# Altium PCB PCB1.PcbDoc (part 2 of 2)
Units mil, origin at the board's own origin, x right, y up, seen from the top; angles counter-clockwise.
Board outline 3937.01 x 3937.01 mil, 2 copper layers (Top Layer, Bottom Layer); 165 components, 130 nets, 568 pads, 491 vias.
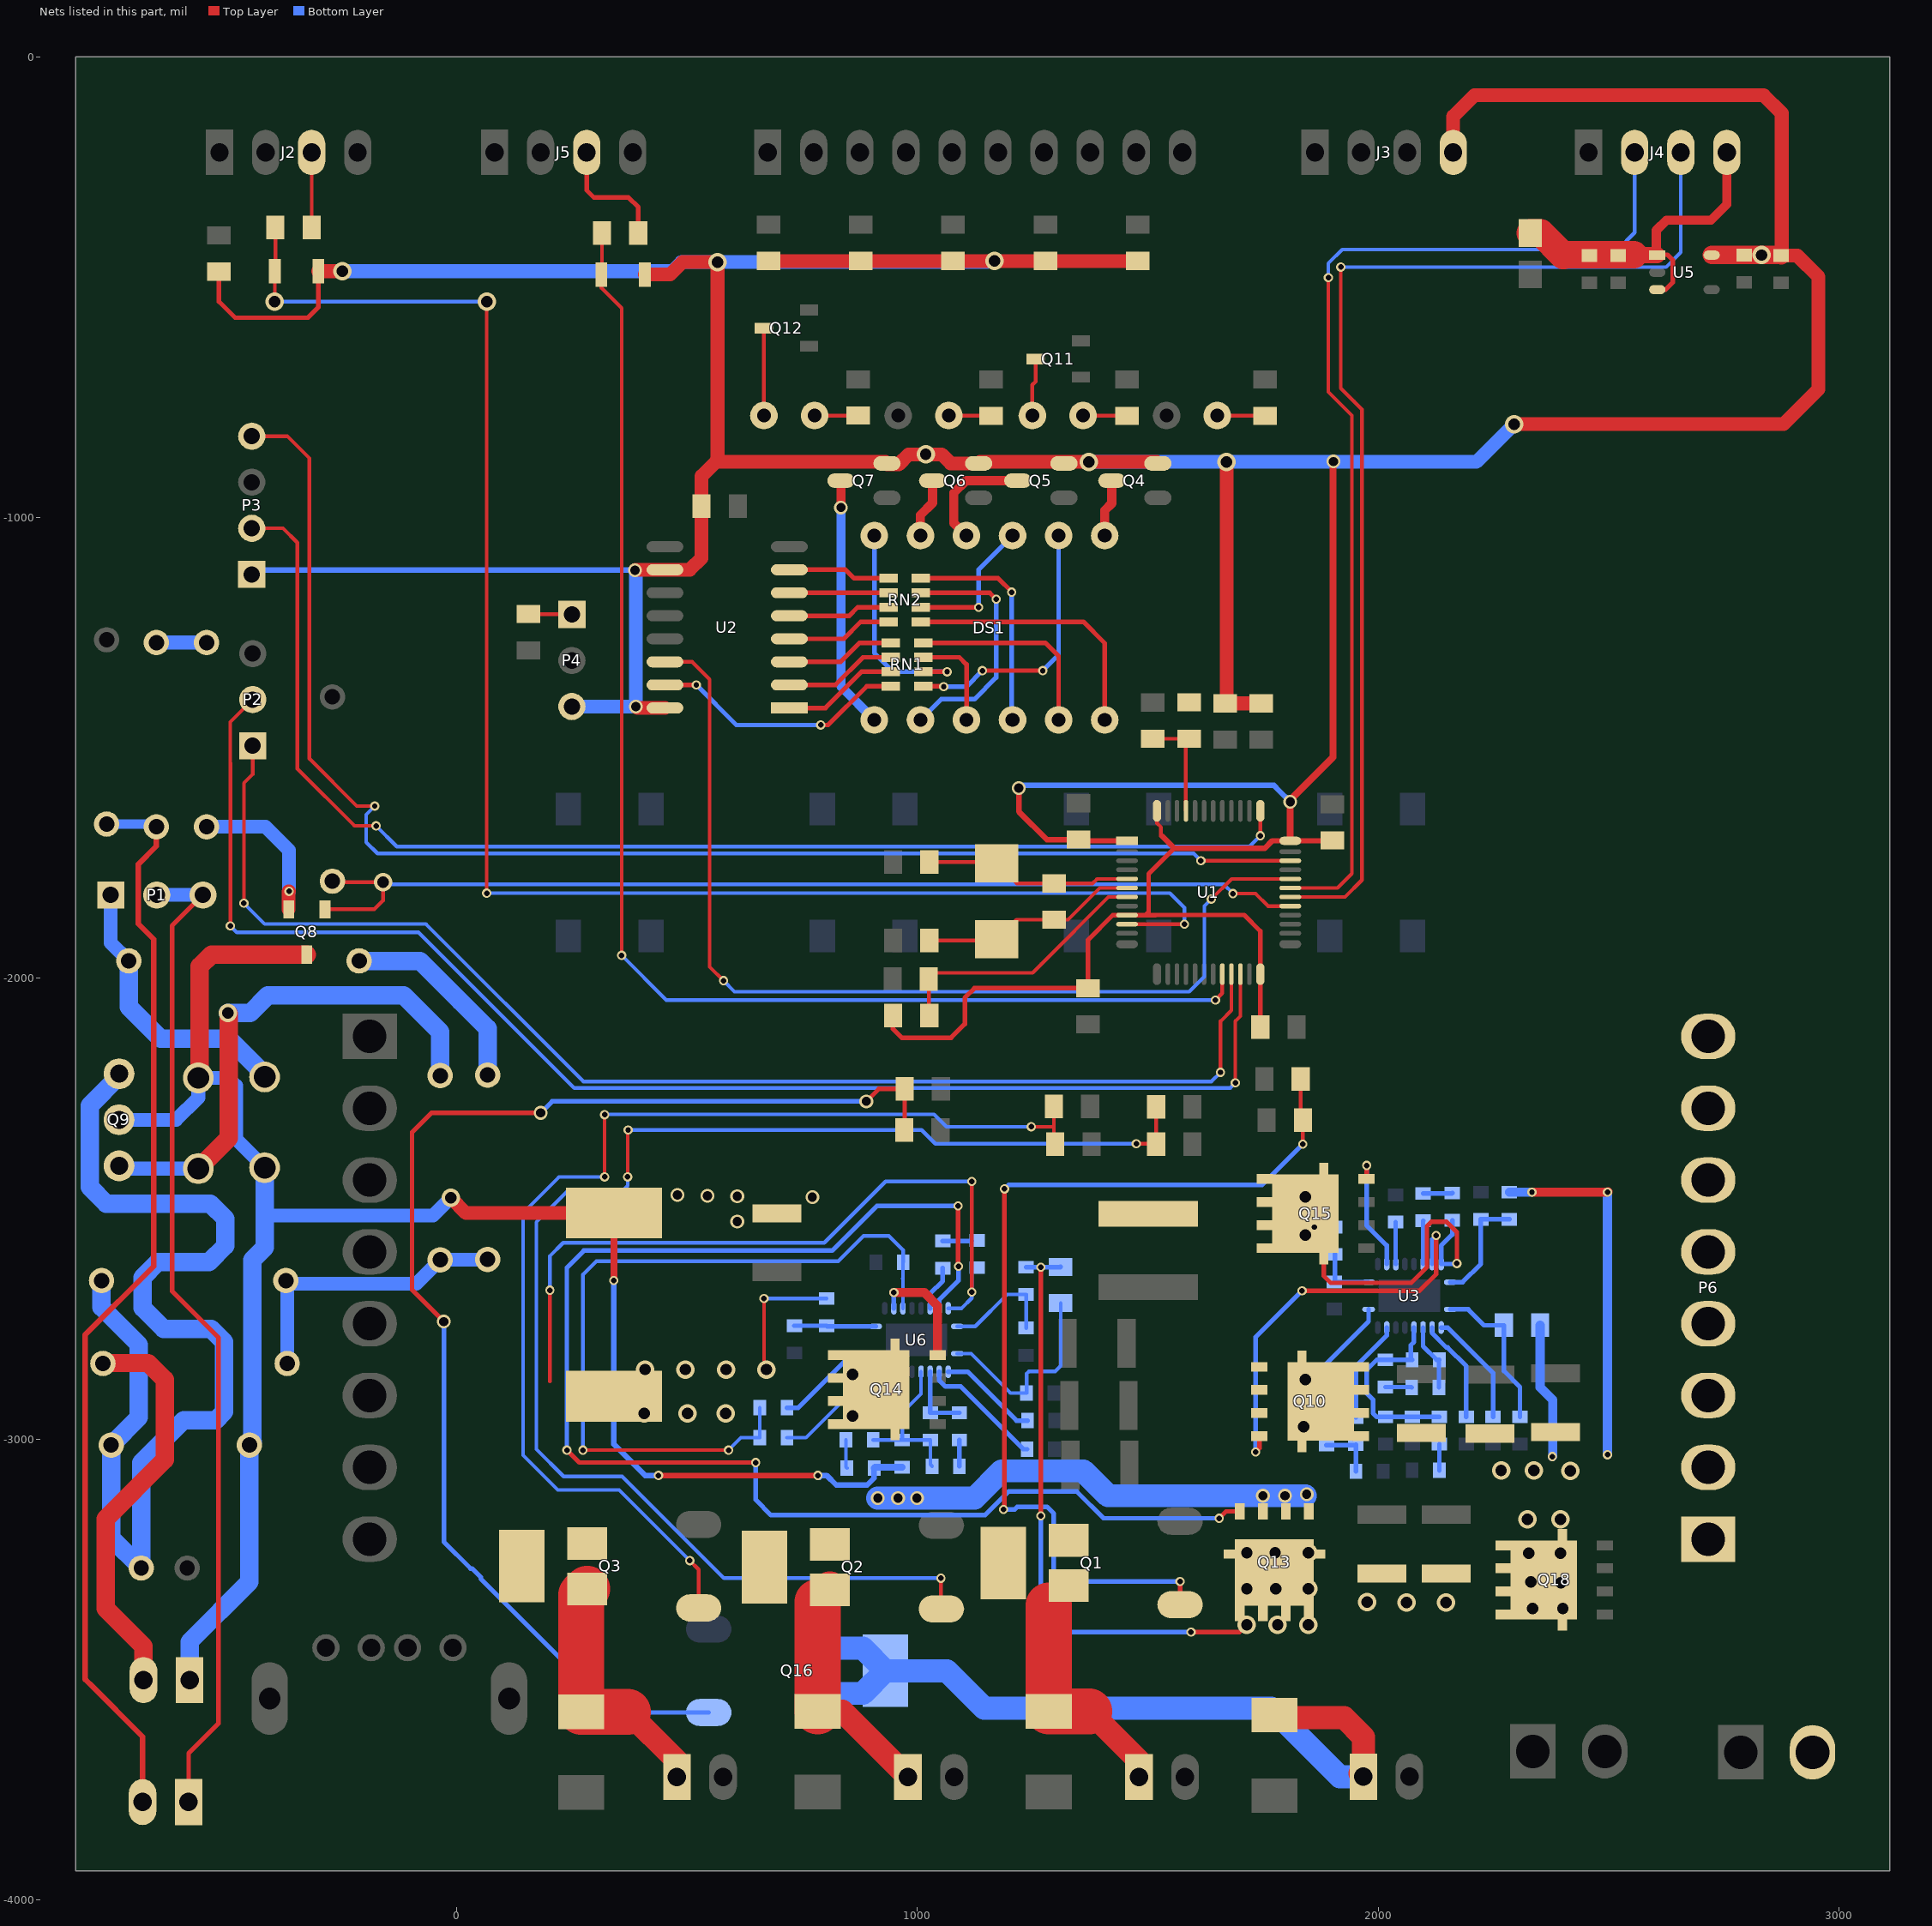
[diagram p2: the nets of this part, all layers, seen from the top]

## Via types
v1: diameter 30, hole 20, Top Layer to Bottom Layer, tented both sides, 241 vias
v2: diameter 20, hole 12, Top Layer to Bottom Layer, tented both sides, 174 vias
v3: diameter 40, hole 25, Top Layer to Bottom Layer, tented both sides, 75 vias
v4: diameter 50, hole 28, Top Layer to Bottom Layer, 1 vias

## Nets (pads, with @x,y where several pads share a name; then routed paths per layer and width w, separated by ;. In a path a pad name is that pad's centre, name@x,y a point inside that pad or via, vN(x,y) a via of type N, cw(c..) or ccw(c..) an arc to the next point about the centre after c; other vN are vias at no path point) (continued)
M74HC595_SI: U1.32 U2.14 | length 2210.5
  Top Layer w8: U2.14@452,-1313 511.01,-1313 549.01,-1350.99 549.01,-1975.01 v2(579,-2005) ; v2(1638,-1828) 1681.95,-1784.05 U1.32@1809.33,-1784.05
  Bottom Layer w8: v2(579,-2005) 603,-2029 1590,-2029 1623,-1996 1623,-1843 v2(1638,-1828)
NetC1_2: C1.2 R14.2 U1.5 Y1.2 | length 452.5
  Top Layer w8: C1.2@1025.74,-1747.62 1169.68,-1747.62 Y1.2@1172,-1749.94 1215.94,-1793.88 R14.2@1297,-1793.88 1380.12,-1793.88 1389.95,-1784.05 U1.5@1455,-1784.05
NetC2_2: C2.2 R14.1 U1.6 Y1.1 | length 476.4
  Top Layer w8: C2.2@1025.74,-1917.62 1169.68,-1917.62 Y1.1@1172,-1915.3 1214.68,-1872.62 R14.1@1297,-1872.62 1326.83,-1872.62 1395.72,-1803.74 U1.6@1455,-1803.74
NetC3_2: C3.2 R15.2 U1.7 | length 563.6
  Top Layer w8: R15.2@1024.74,-2081 C3.2@1024.74,-2021.62 ; C3.2@1024.74,-2002 1038.74,-1988 1250,-1988 1269,-1969 1414.58,-1823.42 U1.7@1455,-1823.43
NetC12_2: C12.2 R27.2 U3.11 | length 134.9
  Bottom Layer w10: R27.2@1906,-2599.06 1906,-2657.94 C12.2@1905,-2658.94 1905.53,-2659.47 U3.11@1979.42,-2659.47
NetC14_1: C14.1 C32.1 U3.4 | length 148.7
  Bottom Layer w10: U3.4@2097.53,-2757.9 2097.53,-2798.53 2127,-2828 C32.1@2133,-2828 2132,-2829 C14.1@2132,-2888
NetC14_2: C14.2 R29.2 | length 57.3
  Bottom Layer w10: R29.2@2016,-2887.06 2072,-2887.06 C14.2@2072.94,-2888
NetC15_1: C15.1 U6.3 | length 271.1
  Bottom Layer w10: U6.3@1047.21,-2853.9 1047.21,-2872.21 1061,-2886 1094,-2886 1230,-3022 C15.1@1238,-3022
NetC16_1: C16.1 L2.2 P1.1 | length 620
  Bottom Layer w30: P1.1@-751,-1819 -751,-1922.95 L2.2@-711.95,-1962
  Bottom Layer w40: L2.2@-711.95,-1962 -711.95,-2062.05 -643,-2131 -495,-2131 -417,-2209 C16.1@-417,-2214
NetC17_1: C17.1 C46.2 L4.1 Q9.3 | length 2451.8
  Bottom Layer w30: Q9.3@-733,-2212.23 Q9.3@-733,-2207
  Bottom Layer w40: C46.2@-771,-2656 -771,-2714 -690,-2795 -690,-2953 C17.1@-750,-3013 -750,-3215 L4.1@-685,-3280 -685,-3051 -593,-2959 -523,-2959 -505,-2941 -505,-2789.13 -533.13,-2761 -636,-2761 -682,-2715 -682,-2649 -649,-2616 -538,-2616 -502,-2580 -502,-2522 -535,-2489 -760.77,-2489 -796.77,-2453 -796.77,-2276 Q9.3@-733,-2212.23
NetC18_1: C18.1 U3.3 | length 226.3
  Bottom Layer w10: U3.3@2117.21,-2757.9 2117.21,-2770.21 2148.27,-2801.27 2150.92,-2801.27 2191.25,-2841.6 C18.1@2191.25,-2951.94
NetC21_1: C21.1 R19.1 | length 63.4
  Bottom Layer w10: R19.1@2098,-2467 2160,-2467 C21.1@2161,-2466
NetC21_2: C21.2 L1.1 Q10.1 Q10.2 Q10.3 Q15.5 Q15.6 Q15.7 Q15.8 R27.1 U3.19 | length 721.6
  Top Layer w10: Q15.8@1882.08,-2589.36 1882.08,-2646.08 1897,-2661 2072,-2661 2106,-2627 2106,-2538 2116,-2528 2148,-2528 2171,-2551 v2(2171,-2619)
  Bottom Layer w10: v2@1861,-2539 v2(1862,-2540) R27.1@1906,-2540 ; C21.2@2161,-2525.06 2161,-2556 2136.9,-2580.1 U3.19@2136.9,-2620.1 2169.9,-2620.1 v2(2171,-2619)
  other v3: 1841.72,-2556.83 1841.72,-2474.41
NetC22_2: C22.2 R21.2 U3.20 | length 241.7
  Bottom Layer w10: U3.20@2156.58,-2659.47 2183.53,-2659.47 2223,-2620 C22.2@2223,-2523.06 R21.2@2285,-2523.06
NetC23_1: C23.1 C46.1 R60.1 R61.1 | length 655.2
  Top Layer w30: C46.1@-371,-2656 C46.1@-364.09,-2662.91 ; R61.1@-36,-2611 R61.1@-35,-2610
  Bottom Layer w30: C23.1@-371,-2833 C23.1@-368,-2836 C46.1@-368,-2659 ; C46.1@-371,-2656 C46.1@-368,-2659 ; R60.1@67,-2610 66,-2611 R61.1@-36,-2611 -87.91,-2662.91 -364.09,-2662.91 C46.1@-368,-2659
NetC23_2: C23.2 HUMID2.2 | length 888.3
  Top Layer w40: C23.2@-768,-2836 -767,-2835 -670,-2835 -634,-2871 -634,-3045 -762,-3173 -762,-3368 -680,-3450 HUMID2.2@-680,-3523
NetC24_2: C24.2 Q9.1 R61.2 | length 1142.1
  Top Layer w40: C24.2@-561,-2412.85 -495,-2346.85 v3@-495,-2077
  Bottom Layer w30: Q9.1@-733,-2407 -727.15,-2412.85 C24.2@-561,-2412.85
  Bottom Layer w40: v3(-497,-2075) -448,-2075 -410,-2037 -115,-2037 -36,-2116 R61.2@-36,-2211
NetC32_2: C32.2 C33.1 R29.1 R45.1 R48.2 U3.5 | length 429.2
  Bottom Layer w10: U3.5@2077.84,-2757.9 2077.84,-2789.16 2071,-2796 2071,-2825.06 C32.2@2073.94,-2828 R29.1@2016,-2828 1997,-2828 1975,-2850 1975,-2900 1989,-2914 1989,-2944 1997,-2952 2016.07,-2952 R45.1@2016.12,-2951.94 R48.2@2074.5,-2951.94 C33.1@2132.87,-2951.94
NetC33_2: C33.2 R49.2 | length 57.1
  Bottom Layer w10: C33.2@2132.87,-3011 2133.06,-3011.18 R49.2@2133.06,-3068
NetC34_1: C34.1 R28.2 R42.2 | length 121.7
  Bottom Layer w10: R42.2@1888,-3013.06 R28.2@1950.69,-3013.06 ; R28.2@1951.75,-3012 R28.2@1950.69,-3013.06 ; C34.1@1952,-3070 1952,-3014.36 R28.2@1950.69,-3013.06
NetC38_1: C38.1 R35.1 | length 63
  Bottom Layer w10: R35.1@1055,-2570 C38.1@1118,-2570
NetC38_2: C38.2 L5.1 Q13.1 Q13.2 Q13.3 Q14.5 Q14.6 Q14.7 Q14.8 R38.1 U6.19 | length 2865.1
  Top Layer w8: 202,-2875 v2(202,-2677) ; 667,-2829 v2(667,-2695) ; v2(1118,-2681) v2(1118,-2441)
  Bottom Layer w8: v2(202,-2677) 202,-2603 231,-2574 798,-2574 931,-2441 v2(1118,-2441) ; v2(667,-2695) R38.1@803,-2695 ; U6.19@1066.9,-2716.1 1095.9,-2716.1 1118,-2694 v2(1118,-2681) C38.2@1118,-2629.06
  Bottom Layer w50: v1(914,-3128) v1(958,-3128) v1(999,-3128) 1124,-3128 1183,-3069 1360,-3069 1414,-3123 v1(1750,-3123) v1(1798,-3123) v1@1842,-3123
  other v1: 1845,-3120
  other v3: 859,-2950 407,-2944 501,-2944 584,-2944 859,-2860 409,-2849 496.67,-2849 584.33,-2849 672,-2849
NetC39_2: C39.2 R37.2 U6.20 | length 251.1
  Bottom Layer w8: U6.20@1086.58,-2755.47 1125.53,-2755.47 1194.94,-2686.06 R37.2@1236,-2686.06 C39.2@1236,-2758.94
NetC40_2: C40.2 R38.2 U6.11 | length 177.1
  Bottom Layer w10: C40.2@733,-2753.94 733.11,-2754.06 R38.2@803,-2754.06 804.42,-2755.47 U6.11@909.42,-2755.47
NetC51_1: C51.1 C52.1 U6.4 | length 152.3
  Bottom Layer w10: U6.4@1027.53,-2853.9 1027.53,-2942.47 C52.1@1028,-2942.94 1090.94,-2942.94 C51.1@1091,-2943
NetC51_2: C51.2 R41.2 | length 56.9
  Bottom Layer w10: C51.2@1091,-3002.06 1091,-3058.89 R41.2@1091.06,-3058.94
NetC52_2: C52.2 C53.1 R41.1 R43.1 R44.2 U6.5 | length 347.6
  Bottom Layer w8: C53.1@904,-3001.94 904.06,-3001.89 R44.2@967,-3001.89 ; U6.5@1007.84,-2853.9 1007.84,-2902.1 R43.1@967,-2942.94 R44.2@967,-3001.89 ; R41.1@1032,-3058.94 1028,-3054.94 C52.2@1028,-3002 1027.89,-3001.89 R44.2@967,-3001.89
NetC53_2: C53.2 R46.2 | length 61.8
  Bottom Layer w8: C53.2@844.94,-3001.94 844.94,-3060.94 R46.2@846.94,-3062.94
NetDL1_A: DL1.A R30.1 | length 104.5
  Top Layer w8: DL1.A@1650.74,-778.37 1754.37,-778.37 R30.1@1755,-779
NetDL2_A: DL2.A R31.1 | length 92.2
  Top Layer w8: DL2.A@1068.06,-778.37 1159.37,-778.37 R31.1@1160,-779
NetDL3_A: DL3.A R32.1 | length 95.9
  Top Layer w8: DL3.A@1359.4,-778.37 1454.37,-778.37 R32.1@1455,-779
NetDL3_K: DL3.K Q11.3 | length 125.7
  Top Layer w8: DL3.K@1249.4,-778.37 1249.4,-711.6 1256.57,-704.43 Q11.3@1256.57,-655.63
NetDL4_A: DL4.A R33.1 | length 94.9
  Top Layer w8: DL4.A@776.72,-778.37 R33.1@871.63,-778.37
NetDL4_K: DL4.K Q12.3 | length 189.8
  Top Layer w8: Q12.3@666.57,-588.63 666.57,-778.22 DL4.K@666.72,-778.37
NetDS1_a: DS1.a RN1.8 | length 580.4
  Top Layer w10: RN1.8@1012.45,-1366.05 v2@1056.05,-1366.05 ; v2(1141,-1332) v2(1272,-1332)
  Bottom Layer w10: v2(1057,-1367) 1106,-1367 v2(1141,-1332) ; v2(1272,-1332) 1306.49,-1297.51 DS1.a@1306.49,-1039
NetDS1_b: DS1.b RN1.6 | length 481.5
  Top Layer w10: RN1.6@1012.45,-1334.55 v2(1064.45,-1334.55)
  Bottom Layer w10: DS1.b@906.49,-1039 906.49,-1293.49 947.55,-1334.55 v2(1064.45,-1334.55)
NetDS1_c: DS1.c RN1.4 | length 220.9
  Top Layer w10: RN1.4@1012.45,-1303.06 1091.06,-1303.06 1106.49,-1318.49 DS1.c@1106.49,-1439
NetDS1_com1: DS1.com1 Q4.3 | length 125.8
  Top Layer w20: DS1.com1@1406.49,-1039 1406.49,-984.51 1422,-969 Q4.3@1422,-919.6
NetDS1_com2: DS1.com2 Q5.3 | length 254.3
  Top Layer w20: DS1.com2@1106.49,-1039 1079,-1011.51 1079,-946 1105.4,-919.6 Q5.3@1218,-919.6
NetDS1_com3: DS1.com3 Q6.3 | length 130.4
  Top Layer w20: DS1.com3@1006.49,-1039 1006.49,-994.51 1033,-968 Q6.3@1033,-919.6
NetDS1_com4: DS1.com4 Q7.3 | length 549.4
  Top Layer w20: v1(834,-978) 834,-921.6 Q7.3@834,-919.6
  Bottom Layer w20: v1(834,-978) 834,-1366.51 DS1.com4@906.49,-1439
NetDS1_d: DS1.d RN1.2 | length 444.5
  Top Layer w10: RN1.2@1012.45,-1271.56 1277.56,-1271.56 1306.49,-1300.49 DS1.d@1306.49,-1439
NetDS1_dp: DS1.dp RN2.2 | length 487.2
  Top Layer w10: RN2.2@1007.45,-1131.56 1175.28,-1131.56 v2@1204.52,-1160.8
  Bottom Layer w10: v2(1204.69,-1161.68) 1204.69,-1437.2 DS1.dp@1206.49,-1439
NetDS1_e: DS1.e RN2.8 | length 584.8
  Top Layer w10: RN2.8@1007.45,-1226.05 1360.05,-1226.05 1406.49,-1272.49 DS1.e@1406.49,-1439
NetDS1_f: DS1.f RN2.6 | length 311.5
  Top Layer w10: RN2.6@1007.45,-1194.55 v2(1133,-1194.55)
  Bottom Layer w10: v2(1133,-1194.55) 1133,-1112.49 DS1.f@1206.49,-1039
NetDS1_g: DS1.g RN2.4 | length 541.9
  Top Layer w10: RN2.4@1007.45,-1163.06 1157.06,-1163.06 v2(1170.92,-1176.92)
  Bottom Layer w10: DS1.g@1006.49,-1439 1051.49,-1394 1124,-1394 1170.92,-1347.08 v2(1170.92,-1176.92)
NetHUMID1_1: HUMID1.1 P1.2 P1.3 | length 2165.5
  Top Layer w10: HUMID1.1@-582,-3788 -582,-3682 -517,-3617 -517,-2780 -618,-2679 -618,-1886 P1.3@-551,-1819
  Bottom Layer w30: P1.2@-651,-1819 P1.3@-551,-1819
NetHUMID1_2: HUMID1.2 R25.2 R26.2 | length 2379.7
  Top Layer w12: HUMID1.2@-682,-3788 -682,-3646 -795.22,-3532.78 -801,-3527 -807,-3521 -807,-2774 -658,-2625 -658,-1915 -691.53,-1881.47 -691.53,-1752.53 -652,-1713 R25.2@-652,-1671
  Bottom Layer w8: R26.2@-760,-1665 R26.2@-754,-1671
  Bottom Layer w20: R26.2@-760,-1665 -658,-1665 R25.2@-652,-1671
NetJ2_3: J2.3 R2.1 | length 163
  Top Layer w8: R2.1@-315,-370 J2.3@-315,-207
NetJ5_3: J5.3 R4.1 | length 272.4
  Top Layer w8: R4.1@389,-377 R4.1@394,-382
  Top Layer w10: J5.3@282,-207 282,-289 298,-305 373,-305 394,-326 R4.1@394,-382
NetL2_1: L2.1 R60.2 | length 440.8
  Bottom Layer w40: L2.1@-211.95,-1962 -80,-1962 8,-2050 67,-2109 R60.2@67,-2210
NetP4_1: P4.1 R17.2 | length 94.3
  Top Layer w8: R17.2@156,-1209.26 249.26,-1209.26 P4.1@250,-1210
NetQ1_1: Q1.1 R1.2 R3.2 | length 2222.5
  Top Layer w8: R3.2@1831.74,-2218 1831.74,-2303 R1.2@1836.74,-2308 v2(1836.74,-2359.74)
  Top Layer w10: v2(1187,-3153) 1189,-3151 1189,-3005 ; 1189,-3089 1189,-3005 ; 1189,-3021 1189,-3005 ; 1189,-2532 1189,-2550 ; v2(1189,-2457) 1189,-2550 ; v2(1570,-3309) 1570.06,-3309.06 Q1.1@1570.06,-3359.55 ; 1189,-3005 1189,-2550
  Bottom Layer w10: v2(1187,-3153) 1211,-3153 1217,-3147 1281,-3147 1296,-3162 1296,-3286 1319,-3309 v2(1570,-3309) ; v2(1189,-2457) 1198,-2448 1748.48,-2448 v2(1836.74,-2359.74)
NetQ2_1: Q2.1 R5.2 R6.2 | length 3145.8
  Top Layer w8: v2(371,-2431) 371,-2330 v2(372,-2329) ; v2(1051,-3302) 1051,-3367.49 Q2.1@1052.06,-3368.55 ; v2(1475,-2359) 1517.52,-2359 R6.2@1518.26,-2359.74 R5.2@1518.26,-2279
  Bottom Layer w8: v2(371,-2431) 371,-2450 357,-2464 238,-2464 173,-2529 173,-3022 232,-3081 359,-3081 580,-3302 v2(1051,-3302) ; v2(372,-2329) 1009,-2329 1039,-2359 v2(1475,-2359)
NetQ3_1: Q3.1 R10.2 R11.2 | length 2507.5
  Top Layer w8: v2(321,-2431) v2(321,-2296) ; v2(506,-3264) 525.06,-3283.06 Q3.1@525.06,-3366.55 ; v2(1247,-2322) 1296.26,-2322 ; R10.2@1296.26,-2278 1296.26,-2322 ; R11.2@1299.26,-2359.74 1296.26,-2356.74 1296.26,-2322
  Bottom Layer w8: v2(321,-2431) 222,-2431 144,-2509 144,-3035 219.48,-3110.48 352.48,-3110.48 v2(506,-3264) ; v2(321,-2296) 322,-2295 1036,-2295 1063,-2322 v2(1247,-2322)
NetQ8_2: Q8.2 R24.2 | length 334.1
  Top Layer w30: Q8.2@-364.74,-1850 -364.74,-1811.74 v2(-364,-1811)
  Bottom Layer w30: R24.2@-539,-1675 R24.2@-543,-1671 -415,-1671 -364,-1722 v2(-364,-1811)
NetQ10_4: Q10.4 U3.18 | length 873.2
  Top Layer w10: v2(1734,-3028) 1742.4,-3019.6 Q10.4@1742.4,-2993.38 ; v2(1835,-2678) 2090,-2678 2126,-2642 v2(2126,-2558)
  Bottom Layer w10: v2(1734,-3028) 1734,-2779 v2(1835,-2678) ; U3.18@2117.21,-2620.1 2117.21,-2566.79
NetQ13_4: Q13.4 U6.18 | length 3157.9
  Top Layer w10: v2(239,-3024) 266,-3051 v2(649,-3051) ; v2@1088,-2625 v2(1088,-2494) ; v2(1655,-3172) 1669.87,-3157.13 Q13.4@1699.79,-3157.13
  Bottom Layer w10: v2(239,-3024) 239,-2628 276,-2591 815,-2591 912,-2494 v2(1088,-2494) ; v2(649,-3051) 649,-3132 682,-3165 1146.72,-3165 1197.72,-3114 1346,-3114 1404,-3172 v2(1655,-3172) ; U6.18@1047.21,-2716.1 1047.21,-2697.79 1089,-2656 v2(1089,-2625)
NetQ14_4: Q14.4 U6.13 | length 247.7
  Top Layer w20: v2(949,-2682) 1015,-2682 1043.6,-2710.6 Q14.4@1043.6,-2817.62
  Bottom Layer w10: U6.13@948.79,-2716.1 948.79,-2682.21 v2(949,-2682)
NetQ15_4: Q15.4 U3.13 | length 262
  Top Layer w10: Q15.4@1974.6,-2435.62 1975,-2435.22 v2(1975,-2406)
  Bottom Layer w10: v2(1975,-2406) 1975,-2536 2018.79,-2579.79 U3.13@2018.79,-2620.1
NetQ16_1: Q16.1 R52.2 R53.2 | length 2848.4
  Top Layer w10: v1(-28,-2745) -97,-2676 -97,-2334 -55,-2292 v1(182,-2292) v1@183,-2293 ; v1(889,-2267) 916,-2240 R52.2@972.26,-2240 972.26,-2328 R53.2@971.26,-2329
  Bottom Layer w10: v1(-28,-2745) -28,-3223 30,-3281 33.25,-3281 52,-3299.75 52,-3303 342.55,-3593.55 Q16.1@546.94,-3593.55 ; v1(182,-2292) 207,-2267 v1(889,-2267) v1@890,-2266
NetR19_2: R19.2 U3.17 | length 94.2
  Bottom Layer w10: U3.17@2097.53,-2620.1 2097.53,-2526.53 R19.2@2098,-2526.06
NetR20_1: R20.1 R51.2 U3.1 | length 344.1
  Bottom Layer w10: U3.1@2156.58,-2718.53 2195.53,-2718.53 2230,-2753 R20.1@2273,-2753 2273,-2852 2308,-2887 R51.2@2308,-2951.94
NetR24_1: R24.1 R25.1 | length 109
  Bottom Layer w30: R25.1@-652,-1271 R24.1@-543,-1271
NetR28_1: R28.1 U3.8 | length 222.8
  Bottom Layer w10: R28.1@1951.75,-2952.94 1951.75,-2842.25 2018.79,-2775.21 U3.8@2018.79,-2757.9
NetR34_2: R34.2 R36.1 U6.1 | length 444.8
  Bottom Layer w8: U6.1@1086.58,-2814.53 1116.53,-2814.53 1202,-2900 R34.2@1236.94,-2900 1236.94,-2858.06 1242,-2853 1299,-2853 1311,-2841 R36.1@1311,-2705
NetR35_2: R35.2 U6.17 | length 98.4
  Bottom Layer w10: U6.17@1027.53,-2716.1 1027.53,-2684.47 1055,-2657 R35.2@1055,-2629.06
NetR39_1: R39.1 U6.10 | length 242.1
  Bottom Layer w10: R39.1@718,-2932 R39.1@717,-2932 741.53,-2932 859,-2814.53 U6.10@909.42,-2814.53
NetR40_1: R40.1 U6.8 | length 304.7
  Bottom Layer w8: R40.1@717,-2997 758,-2997 854,-2901 925,-2901 948.79,-2877.21 U6.8@948.79,-2853.9
NetR42_1: R42.1 U3.10 | length 273.3
  Bottom Layer w10: R42.1@1888,-2954 1888,-2836 1979.42,-2744.58 U3.10@1979.42,-2718.53
NetR47_2: R47.2 U6.2 | length 216
  Bottom Layer w10: U6.2@1066.9,-2853.9 1108.9,-2853.9 1215,-2960 R47.2@1238.94,-2960
NetR50_2: R50.2 U3.2 | length 248.9
  Bottom Layer w10: U3.2@2136.9,-2757.9 2150.9,-2757.9 2249.62,-2856.62 R50.2@2249.62,-2951.94
NetRN1_1: RN1.1 U2.3 | length 237.6
  Top Layer w10: U2.3@722,-1313 833,-1313 874.44,-1271.56 RN1.1@942.45,-1271.56
NetRN1_3: RN1.3 U2.2 | length 245.3
  Top Layer w10: U2.2@722,-1363 822,-1363 881.94,-1303.06 RN1.3@942.45,-1303.06
NetRN1_5: RN1.5 U2.1 | length 252.9
  Top Layer w10: U2.1@722,-1413 800.28,-1413 878.73,-1334.55 RN1.5@942.45,-1334.55
NetRN1_7: RN1.7 U2.15 | length 561.3
  Top Layer w10: U2.15@452,-1363 v2(520,-1363) ; v2(790,-1450) 806,-1450 889.95,-1366.05 RN1.7@942.45,-1366.05
  Bottom Layer w10: v2(520,-1363) 607,-1450 v2(790,-1450)
NetRN2_1: RN2.1 U2.7 | length 223.1
  Top Layer w10: U2.7@722,-1113 844,-1113 862.56,-1131.56 RN2.1@937.45,-1131.56
NetRN2_3: RN2.3 U2.6 | length 215.4
  Top Layer w10: U2.6@722,-1163 RN2.3@937.39,-1163
NetRN2_5: RN2.5 U2.5 | length 223.1
  Top Layer w10: U2.5@722,-1213 852,-1213 870.45,-1194.55 RN2.5@937.45,-1194.55
NetRN2_7: RN2.7 U2.4 | length 230.8
  Top Layer w10: U2.4@722,-1263 840,-1263 876.95,-1226.05 RN2.7@937.45,-1226.05
OUT1: D1.A J1.1 Q1.2 | length 505.1
  Top Layer w50: 1373.09,-3591 1481,-3698.91 J1.1@1481,-3733.5
  Top Layer w100: 1284.97,-3361.18 D1.A@1284.97,-3591 1373.09,-3591
OUT2: D4.A J6.1 Q2.2 | length 529.8
  Top Layer w50: D4.A@783.49,-3591 837,-3591 J6.1@979.5,-3733.5
  Top Layer w80: Q2.2@783.49,-3353.66 Q2.2@809.94,-3327.21
  Top Layer w100: D4.A@783.49,-3591 Q2.2@783.49,-3353.66
OUT3: D5.A J7.1 Q3.2 | length 559
  Top Layer w50: 371.09,-3592 478,-3698.91 J7.1@478,-3733.5
  Top Layer w100: Q3.2@282.94,-3325.21 270,-3338.15 D5.A@270,-3592 371.09,-3592
OUT4: D6.A J9.1 Q16.2 | length 1769.7
  Top Layer w50: D6.A@1775,-3599 1781,-3605 1926,-3605 1968,-3647 J9.1@1968,-3733 J9.1@1961,-3726
  Bottom Layer w50: Q16.2@789.06,-3552.21 881.58,-3552.21 Q16.2@930.8,-3503 ; Q16.2@789.06,-3453.79 881.58,-3453.79 Q16.2@930.8,-3503 ; J9.1@1971,-3730 J9.1@1968,-3733 1917,-3733 1768,-3584 1145,-3584 1064,-3503 Q16.2@930.8,-3503
PWM: Q8.1 R23.2 U1.29 | length 2285.6
  Top Layer w8: Q8.1@-286,-1850 -179,-1850 -160,-1831 v3(-160,-1791) -268,-1791 R23.2@-270,-1789 ; v2(1685,-1816) 1733.89,-1816 1761,-1843.11 U1.29@1809.33,-1843.11
  Bottom Layer w8: v3@-170,-1791 v3(-160,-1791) -146,-1791 -141,-1796 1665,-1796 v2(1685,-1816)
PWM_AD: R16.1
PWM_AD_OUT: R16.2 R18.1 U1.45 | length 237.7
  Top Layer w8: R18.1@1505,-1480 R18.1@1511,-1480 1582.74,-1480 1583,-1479.74 1586.5,-1483.24 R16.2@1589.19,-1485.93 ; R16.2@1582.19,-1485.93 1582.19,-1635.65 U1.45@1582.95,-1636.42
RX: J4.2 U1.31 | length 2359.3
  Top Layer w8: U1.31@1809.33,-1803.74 1912,-1803.74 1943,-1772.74 1943,-778 1892,-727 v2(1892,-479)
  Bottom Layer w8: v2(1892,-479) 1892,-460 1892,-448 1922,-418 2457,-418 2520.23,-418 2557,-381.23 J4.2@2557,-207
RX3: P2.2 U1.22 | length 3083.6
  Top Layer w8: -491.53,-1532.4 -491.53,-1443.53 P2.2@-443,-1395 ; v2(-491.44,-1886) -491.44,-1532.48 ; v2(1690,-2227) 1690,-2093 1701.06,-2081.94 U1.22@1701.06,-1990.75
  Bottom Layer w8: v2(-491.44,-1886) -477.44,-1900 -83,-1900 255,-2238 340,-2238 1679,-2238 v2(1690,-2227)
SW1: D2.A R2.2 U1.10 | length 3594.3
  Top Layer w8: v3(-395,-531) D2.A@-395,-465 -393.74,-463.74 R2.2@-393.74,-370 ; v2(65,-1815) v3(65,-531) ; U1.10@1455,-1882.48 v2(1579.52,-1882.48) v2@1580,-1882
  Bottom Layer w8: v3(-395,-531) v3(65,-531) ; v2(65,-1815) 1548,-1815 1579.52,-1846.52 v2(1579.52,-1882.48)
SW2: D3.A R4.2 U1.20 | length 2978.3
  Top Layer w8: R4.2@315.26,-382 315.26,-470.74 D3.A@314,-472 314,-501 358,-545 v2(358,-1950) ; v2(1647,-2047) 1661.69,-2032.31 U1.20@1661.69,-1990.75
  Bottom Layer w8: v2(358,-1950) 455,-2047 v2(1647,-2047)
SWCLK: P3.2 U1.37 | length 2827
  Top Layer w8: P3.2@-445,-1023 -377,-1023 -346,-1054 -346,-1545 -222,-1669 v2(-175,-1669) ; v2(1744.37,-1690.37) U1.37@1744.37,-1636.42
  Bottom Layer w8: v2(-175,-1669) -130,-1714 1720.74,-1714 v2(1744.37,-1690.37)
SWD: P3.4 U1.34 | length 3090.2
  Top Layer w8: P3.4@-445,-823 -368,-823 -319.69,-871.31 -319.69,-1523.31 -217,-1626 v2(-178,-1626) ; v2(1615.31,-1744.69) U1.34@1809.33,-1744.69
  Bottom Layer w8: v2(-178,-1626) -196.5,-1644.5 -196.5,-1704.5 -172,-1729 1599.63,-1729 v2(1615.31,-1744.69)
TX: J4.3 U1.30 | length 2495.8
  Top Layer w8: U1.30@1809.33,-1823.43 1928,-1823.42 1965,-1786.42 1965,-765 1948,-748 ; v2(1919,-456) 1919,-719 1948,-748 ; 1943,-743 1948,-748
  Bottom Layer w8: v2(1919,-456) 2625,-456 2657,-424 J4.3@2657,-207
TX3: P2.1 U1.21 | length 2861.3
  Top Layer w8: v2(-461.95,-1837) -461.95,-1575.95 -443,-1557 P2.1@-443,-1495 ; v2(1658,-2204) 1658,-2093 1681.38,-2069.62 U1.21@1681.38,-1990.75
  Bottom Layer w8: v2(-461.95,-1837) -416.95,-1882 -67,-1882 275,-2224 359,-2224 1638,-2224 v2(1658,-2204)
VCC: C27.2 C28.1 FU2.2 J4.4 U5.1 U5.3 | length 790.3
  Top Layer w10: U5.3@2606,-504.8 2624,-504.8 2640,-488.8 2640,-441 2628,-429 U5.1@2618.44,-429
  Top Layer w20: U5.1@2606,-430 2604,-428 2604,-376 2626,-354 2722.65,-354 2757,-319.65 J4.4@2757,-207
  Top Layer w35: C28.1@2520.92,-430.92 2555.06,-430.94 2556,-430 U5.1@2606,-430
  Top Layer w60: FU2.2@2330,-382 2353,-382 2401.94,-430.94 2403.6,-429.29 2520.92,-429.29 2555.06,-429.29
VCC_3.3V: C4.2 C5.2 C6.2 C7.2 C8.2 C25.1 C26.2 D2.K D3.K J3.4 P3.1 P4.3 Q4.2 Q5.2 Q6.2 Q7.2 R7.2 R8.2 R9.2 R12.1 R13.1 R15.1 R22.2 R58.2 R59.1 U1.1 U1.9 U1.24 U1.36 U1.48 U2.10 U2.16 U5.5 | length 13476.5
  Top Layer w8: U1.48@1519.96,-1636.42 1519.96,-1663.15 1528.62,-1671.81 1528.62,-1688.62 1530.62,-1690.62
  Top Layer w10: R22.2@-516,-465.74 -516,-531 -481,-566 -323,-566 -300.51,-543.51 D2.K@-300.51,-465 ; R15.1@947,-2081 947,-2110 966,-2129 1003,-2129 1073,-2129 1103,-2099 1103,-2042 1123.74,-2021.26 1238,-2021.26 1307,-2021.26 C4.2@1370,-2021.26 1370,-1917 1424.21,-1862.79 U1.9@1455,-1862.8 1495.21,-1862.79 ; 1558,-1718 1557,-1718 1502,-1773 1502,-1856 1495.21,-1862.79 ; C6.2@1744.26,-2106 1744.37,-2105.89 U1.24@1744.37,-1990.75 1744.37,-1897.37 1709.48,-1862.48 1517.16,-1862.48 1516.85,-1862.79 1495.21,-1862.79
  Top Layer w12: v1(1220,-1587) 1220,-1638 1280.74,-1698.74 C5.2@1350,-1698.74 1352.64,-1701.38 U1.1@1455,-1701.38 ; 1530.62,-1690.62 1558,-1718 1753.51,-1718 1770.13,-1701.38 U1.36@1809.33,-1701.38 1900.36,-1701.38 C7.2@1901,-1700.74
  Top Layer w15: U1.36@1809.33,-1701.38 v1(1809.33,-1616.67) 1809.33,-1612.67 1902,-1520 1902,-878 v1(1903,-878)
  Top Layer w30: D2.K@-300.51,-465 v3(-248,-465) ; v1@388,-1113 U2.10@452,-1113 506,-1113 531.26,-1087.74 C8.2@531.26,-975 531.26,-909.74 562.15,-878.85 930.65,-878.85 Q7.2@934,-882.2 ; v1@392,-1413 U2.16@452,-1413 ; D3.K@408.49,-472 463,-472 490,-445 v3(566,-445) 566,-875 ; R9.2@677,-442.74 R8.2@877.25,-442.74 R7.2@1077.5,-442.74 v3(1167,-442.74) R59.1@1277.75,-442.74 R58.2@1478,-442.74 ; Q7.2@934,-884.2 959.32,-884.2 981,-862.51 v3(1018,-862.51) 1052.51,-862.51 1072.2,-882.2 Q6.2@1133,-882.2 1136.35,-878.85 1314.65,-878.85 Q5.2@1318,-882.2 1321.35,-878.85 v3(1372,-878.85) 1518.65,-878.85 Q4.2@1522,-882.2 ; R13.1@1668,-1403 1671,-1400 v3(1671,-879) ; R13.1@1671,-1403 R12.1@1746,-1403 ; J3.4@2163,-207 2163,-129 2209,-83 2722,-83 2837,-83 2876,-122 2876,-429.94 C26.2@2875,-430.94 2909.94,-430.94 2956,-477 2956,-721 2880,-797 v3(2295,-797)
  Top Layer w40: U5.5@2724.11,-430 2757,-430 C25.1@2795,-430 v3(2832,-430) 2874.06,-430 C26.2@2875,-430.94
  Bottom Layer w12: P3.1@-445,-1123 -436,-1114 v1(387,-1114) ; v1(1220,-1587) 1225.73,-1581.27 1773.93,-1581.27 1785.4,-1592.74 v1(1809.33,-1616.67)
  Bottom Layer w30: v3(-248,-465) 468,-465 488,-445 v3(566,-445) v3@1151,-445 ; P4.3@250,-1410 v1(389,-1410) 389,-1116 v1(387,-1114) ; v3(1372,-878.85) 2213.15,-878.85 v3(2295,-797)
VCC_12_24: J13.2 P6.5 P6.6 P6.7 P6.8
VCC_24V: C16.2 C17.2 C24.1 C41.1 HUMID2.1 L5.2 Q8.3 Q9.2 R44.1 R46.1 | length 4195.4
  Top Layer w12: v2(438,-3079) v2(784,-3079)
  Top Layer w15: v2(341,-2656) L5.2@341,-2509.36
  Top Layer w30: v3(-13,-2476.3) 20.06,-2509.36 L5.2@341,-2509.36
  Top Layer w40: C24.1@-561,-2216 -558,-2213 -558,-1974 -532.43,-1948.43 Q8.3@-325.37,-1948.43
  Bottom Layer w12: v2(341,-2656) 341,-3011 348,-3018 354,-3024 409,-3079 v2(438,-3079) ; v2@788,-3083 v2(784,-3079) 803,-3079 824,-3100 891,-3100 906,-3085 R46.1@906,-3062.94
  Bottom Layer w15: R46.1@906,-3062.94 908,-3060.94 R44.1@967,-3060.94
  Bottom Layer w30: Q9.2@-733,-2307 -609,-2307 -561,-2259 C24.1@-561,-2216 ; C24.1@-567,-2222 C24.1@-561,-2216 ; -417,-2503 -405,-2515 -51.7,-2515 v3(-13,-2476.3) ; C16.2@-417,-2410.85 -479,-2348.85 -479,-2233 -496,-2216 C24.1@-561,-2216
  Bottom Layer w40: HUMID2.1@-580,-3523 -580,-3440 -450,-3310 C17.2@-450,-3013 C17.2@-444,-3007 ; C17.2@-443,-3006 C17.2@-444,-3007 ; C16.2@-417,-2410.85 -417,-2503 -417,-2584 -444,-2611 C17.2@-444,-3007
  other v1: 609,-2528 772,-2475 609,-2473 544,-2471.96 479,-2470
VCC_L: C50.1 R39.2 R40.2 U6.14 | length 1710.4
  Top Layer w8: v2(274,-3024) v2(590,-3024)
  Bottom Layer w8: v2(274,-3024) 274,-2643 303,-2614 828,-2614 883,-2559 938,-2559 969,-2590 C50.1@969,-2616 ; v2(590,-3024) 617,-2997 R40.2@657.94,-2997 R39.2@657.94,-2932 ; 967.74,-2651.73 968.47,-2651 ; U6.14@968.47,-2716.1 968.47,-2651 ; C50.1@968.47,-2616.53 968.47,-2651
VCC_L2: C13.1 U3.14 | length 91.3
  Bottom Layer w10: C13.1@2038,-2529 2038,-2619.63 U3.14@2038.47,-2620.1
VIN: C9.1 C10.1 C11.1 C19.1 C20.1 P6.1 P6.2 P6.3 P6.4 Q10.5 Q10.6 Q10.7 Q10.8 Q13.5 Q13.6 Q13.7 Q13.8 Q18.5 Q18.6 Q18.7 Q18.8 R20.2 R21.1 R36.2 R37.1 | length 2460.2
  Top Layer w10: v2(1268,-3167) 1268,-3127 ; 1268,-3150 1268,-3127 ; 1268,-3113 1268,-3061 ; v2(1268,-2627) 1268,-3061 ; v2(1594,-3419) 1699,-3419 v3(1715,-3403) ; 1268,-3127 1268,-3061
  Top Layer w20: v2(2334,-2464) v2(2498,-2464) v2@2499,-2463
  Bottom Layer w10: R37.1@1236,-2627 v2(1268,-2627) 1310.26,-2627 R36.2@1311,-2626.26 ; v2(1268,-3167) 1268,-3389 1298,-3419 v2(1594,-3419) ; R36.2@1310.26,-2626 R36.2@1311,-2626
  Bottom Layer w20: R21.1@2285,-2464 v2(2334,-2464) ; R20.2@2351.74,-2753 2351.74,-2887.74 2379,-2915 2379,-3037 v2(2378,-3038) ; v2(2498,-3034) v2(2498,-2464)
  other v3: 1782,-3403 1849,-3403 2335,-3368 2401,-3368 2062,-3355 2147,-3355 1976,-3354 1715,-3325 1778,-3325 1849,-3325 2397,-3312 2332,-3310 2327,-3248 2396,-3248 1715,-3247 1776.5,-3247 1849,-3247 2324,-3174 2396,-3174 2417,-3069 2267,-3068 2338,-3068 1838,-2973 1842,-2871
pads on no net: J5.1 U2.9 U3.7 U6.7 USB1.2 USB1.3 USB1.6

## Polygon pours and split planes (outlines as drawn)
+5V on Top Layer "Top Layer-No Net" (solid, remove dead copper, pour order 1000): -312.99,-2041.89 -121,-2041.89 -110.11,-2041.89 -104.49,-2047.51 -93,-2059 -93,-2230 -93,-2322 -107,-2336 -115,-2344 -215,-2344 -272,-2344 -278,-2350 -280,-2352 -280,-2386 -280,-3361 -273,-3368 -257,-3368 -247,-3368 -243,-3372 -236,-3379 -236,-3404 -236,-3484 -251,-3499 -253,-3501 -303,-3501 -334,-3501 -353,-3482 -437,-3398 -437,-2080 -437,-2078 -417,-2058 -400.89,-2041.89 -312.99,-2041.89
GND on Top Layer "Top Layer-No Net" (solid, remove dead copper, pour order 1001): -976,112 3180,112 3214,146 3276,84 3276,-3927 3263,-3927 3125,-4065 3097,-4037 -907,-4037 -907,-3750 -1031,-3626 -873,-3468 -873,153
GND on Bottom Layer "Top Layer-No Net" (solid, remove dead copper, pour order 1002): -976,112 3180,112 3214,146 3276,84 3276,-3927 3263,-3927 3125,-4065 3097,-4037 -907,-4037 -907,-3750 -1031,-3626 -873,-3468 -873,153

## Keep-outs
Keep-Out Layer:
  the board outline again, w10

## Other copper
Top Layer:
  rectangle net GND: 1528,-3283.51 1633.71,-3190
  rectangle net GND: 999.29,-2997 1108,-2857.62
  rectangle net GND: 1288,-2773 1352,-2684
  rectangle net GND: 1288,-3166.71 1374,-2735
  rectangle net GND: 2099.49,-3198.73 2206.71,-3111
  rectangle net GND: 1923,-3219.71 2206.71,-3145
  rectangle net GND: 1955,-2628 2029,-2475
  rectangle net GND: 2034.29,-2900 2477,-2822.36
  rectangle net GND: 2447.33,-3243 2571,-3190.29
  rectangle net GND: 2703,-3703 2805,-3654
  rectangle net GND: 2771,-3782 2811,-3596
  rectangle net GND: 2215,-3698 2404,-3646
  rectangle net GND: 2293,-3822 2366,-3523
  rectangle net OUT1: 1138,-3356 1374,-3182
  rectangle net OUT3: 85,-3354.93 341.24,-3184
  rectangle net OUT2: 614,-3362 855,-3188
  rectangle net VCC_12_24: 2590,-2650 3092,-2028
  rectangle net VCC_12_24: 2851,-3921 3094,-2355
  region net NetC38_2: 984,-2806 984,-3010 1019,-3045 1019,-3152 885,-3152 885,-3008 869,-2992 93,-2992 65,-2964 65,-2806
  region net +48V: 2654.67,-3821 2655,-3658 2655,-3341 2586,-3341 2586,-3258 2449,-3258 2449,-3578 2423,-3604 2423,-3821
  region net VIN: 2432,-3434 2432,-3184 2441,-3175 2601,-3175 2608,-3182 2608,-3295 2620,-3303 2800,-3303 2800,-2673 2561,-2673 2545,-2689 2545,-2901 2526,-2920 2028,-2920 2019,-2911 2019,-2809 2002,-2792 1811,-2792 1800,-2803 1800,-3043 1837,-3080 2222,-3080 2222,-3235 1923,-3235 1887,-3199 1667,-3199 1649,-3217 1649,-3434
  region net NetC21_2: 1772,-2964 1781,-2955 1781,-2646 1793,-2634 1917,-2634 1928,-2623 1928,-2396 1915,-2383 1719,-2383 1690,-2412 1381,-2412 1362,-2431 1362,-2537 1376,-2551 1645,-2551 1645,-2959 1650,-2964
  region net +12V: 1611,-2626 1626,-2641 1626,-3113 1617,-3122 1513,-3122 1513,-3422 1628,-3537 1658,-3537 1687,-3566 1687,-3736 1666,-3757 1553,-3757 1535,-3739 1535,-3618 1402,-3485 1402,-2721 1375,-2721 1367,-2713 1367,-2631 1372,-2626
  region net NetC38_2: 1729,-3178 1863,-3178 1868,-3173 1868,-3106 1865,-3103 1729,-3103
  region net VCC_24V: 787,-2452 794,-2459 794,-2524 770,-2548 576,-2548 546,-2578 232,-2578 216,-2562 216,-2460 224,-2452
Bottom Layer:
  rectangle net GND: 2703,-3700 2794,-3654
  rectangle net GND: 2766,-3801 2806,-3581
  rectangle net GND: 2224,-3698 2404,-3634
  rectangle net GND: 2305,-3805 2357,-3553
  rectangle net VCC_12_24: 2596,-2650 3097,-2029
  rectangle net VCC_12_24: 2850,-3921 3096,-2609
  rectangle net VIN: 2621,-3289 2805,-2682
  rectangle net VIN: 1951,-3427 2417,-3215
  region net +48V: 2654.67,-3821 2655,-3658 2655,-3341 2586,-3341 2586,-3340 2449,-3340 2449,-3578 2423,-3604 2423,-3821

## Silkscreen, mask and mechanical layers (free items; w line width, h text height)
Top Overlay:
  text "串口" at 2547,69 h50
  text "目标温度、环境温度、水温、压缩机排气温度、目标送风温度" at 568,32 h50
  text "iic湿度" at 1946,25 h50
  text "湿度" at -455,14 h50
  text "-  SW2" at 185,-45 h50
  text "5V" at 352,-47 h50
  text "A6     -     SW1    5V" at -556,-52 h50
  text "-     A1     -      A2     -     A3     -      A4    -      A5" at 668,-52 h50
  text "-     RX    TX    3.3V" at 2425,-53 h50
  text "-     SCL  SDA   3.3V" at 1813,-57 h50
  text "SWD" at -372.94,-845.46 h50
  text "GND" at -371,-942 h50
  text "SWCLK" at -369.97,-1030.03 h50
  text "3.3V" at -372,-1137 h50
  text "GND" at -374,-1312 h50
  text "RX3" at -374,-1407 h50
  text "TX3" at -369.68,-1504.84 h50
  text "+ -" at 2093,-3843 h60 r180
  text "+ -" at 1107,-3858.1 h60 r180
  text "+ -" at 1616,-3868 h60 r180
  text "+ -" at 607,-3871 h60 r180
  text "SW1 SW2" at -765,-3907 h40
  text "- 48V" at 2292,-3923 h50
  text "- 12V" at 2759,-3924 h50
  text "热风" at 1450,-3993 h50
  text "电磁阀" at 1950,-4000 h50
  text "冷风" at 1007,-4002 h50
  text "水泵" at 476,-4004 h50
  text "水位开关2" at -761,-4023 h50
Bottom Overlay:
  text "OUT" at 162,-1211 h50
  text "GND" at 161,-1322 h50
  text "3.3V" at 169,-1438 h50
Top Solder:
  rectangle: 2855,-3796 3094,-2028.41
Bottom Solder:
  rectangle: 2852,-3808 3098,-2033
  rectangle: 1718,-3913 2833,-3838
  rectangle: 2677,-3867 2834,-3599
  rectangle: 1719,-3871 1836,-3604
  rectangle: 1731,-3853 1994,-3764
Mechanical 1:
  the board outline again, w10

## Text inside footprints (layer, text, board x,y; h text height)
Q1: Top Overlay "3" at 1422.43,-3211.91 h43.31 r90; Top Overlay "1" at 1422.43,-3347.74 h43.31 r90
Q2: Top Overlay "3" at 904.43,-3220.91 h43.31 r90; Top Overlay "1" at 904.43,-3356.74 h43.31 r90
Q3: Top Overlay "3" at 377.43,-3218.91 h43.31 r90; Top Overlay "1" at 377.43,-3354.74 h43.31 r90
Q16: Bottom Overlay "3" at 694.57,-3445.91 h43.31 r270; Bottom Overlay "1" at 694.57,-3581.74 h43.31 r270